# Altium PCB PCB2.PcbDoc
Units mil, origin at the board's own origin, x right, y up, seen from the top; angles counter-clockwise.
Board outline 2850 x 2950 mil, 2 copper layers (Top Layer, Bottom Layer); 19 components, 11 nets, 66 pads, 0 vias.
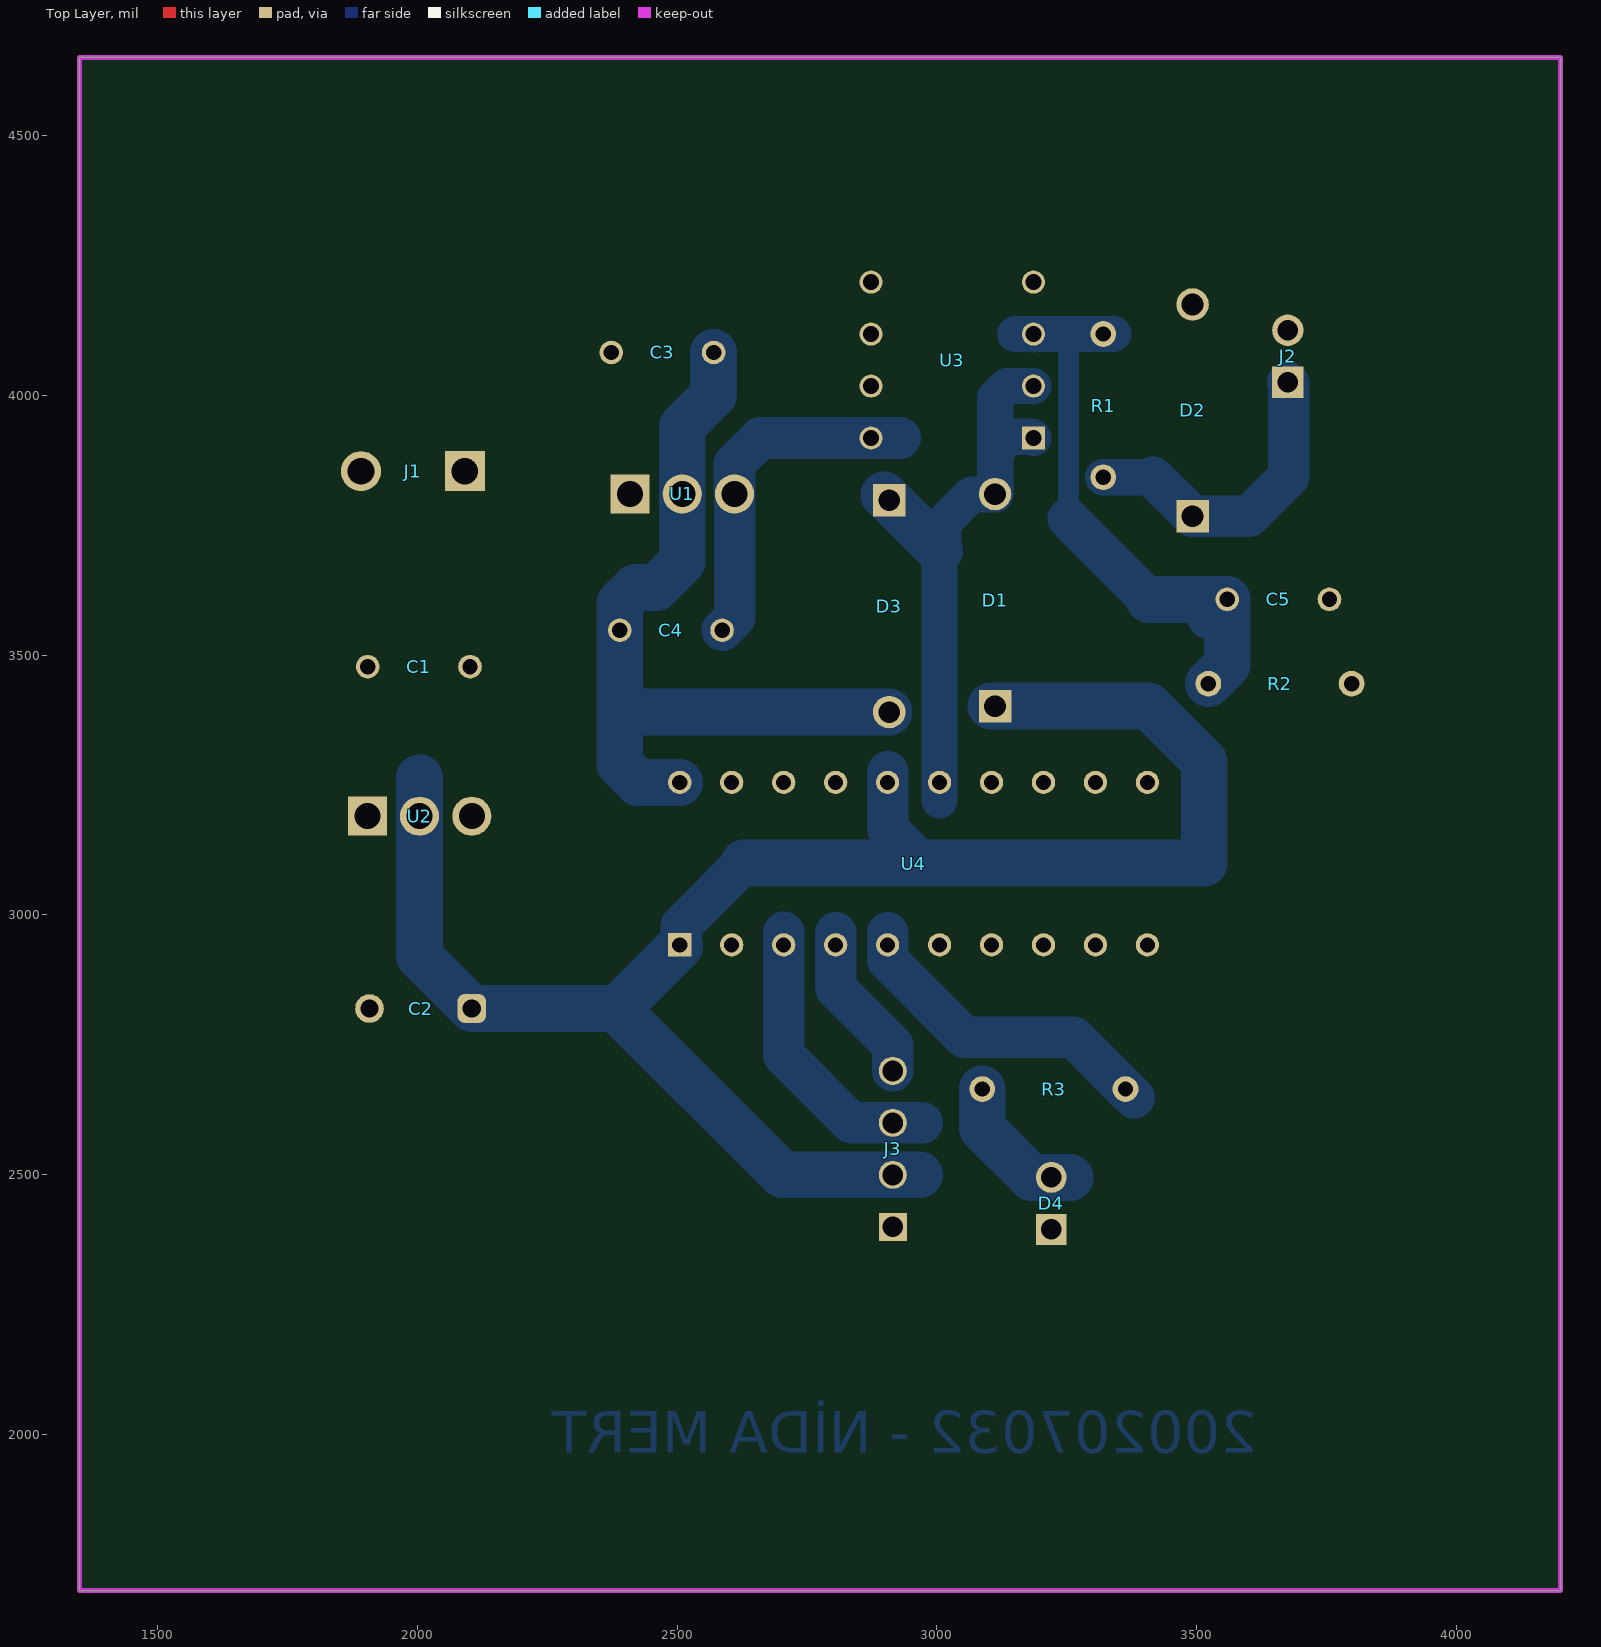
[diagram p0: Top Layer view]
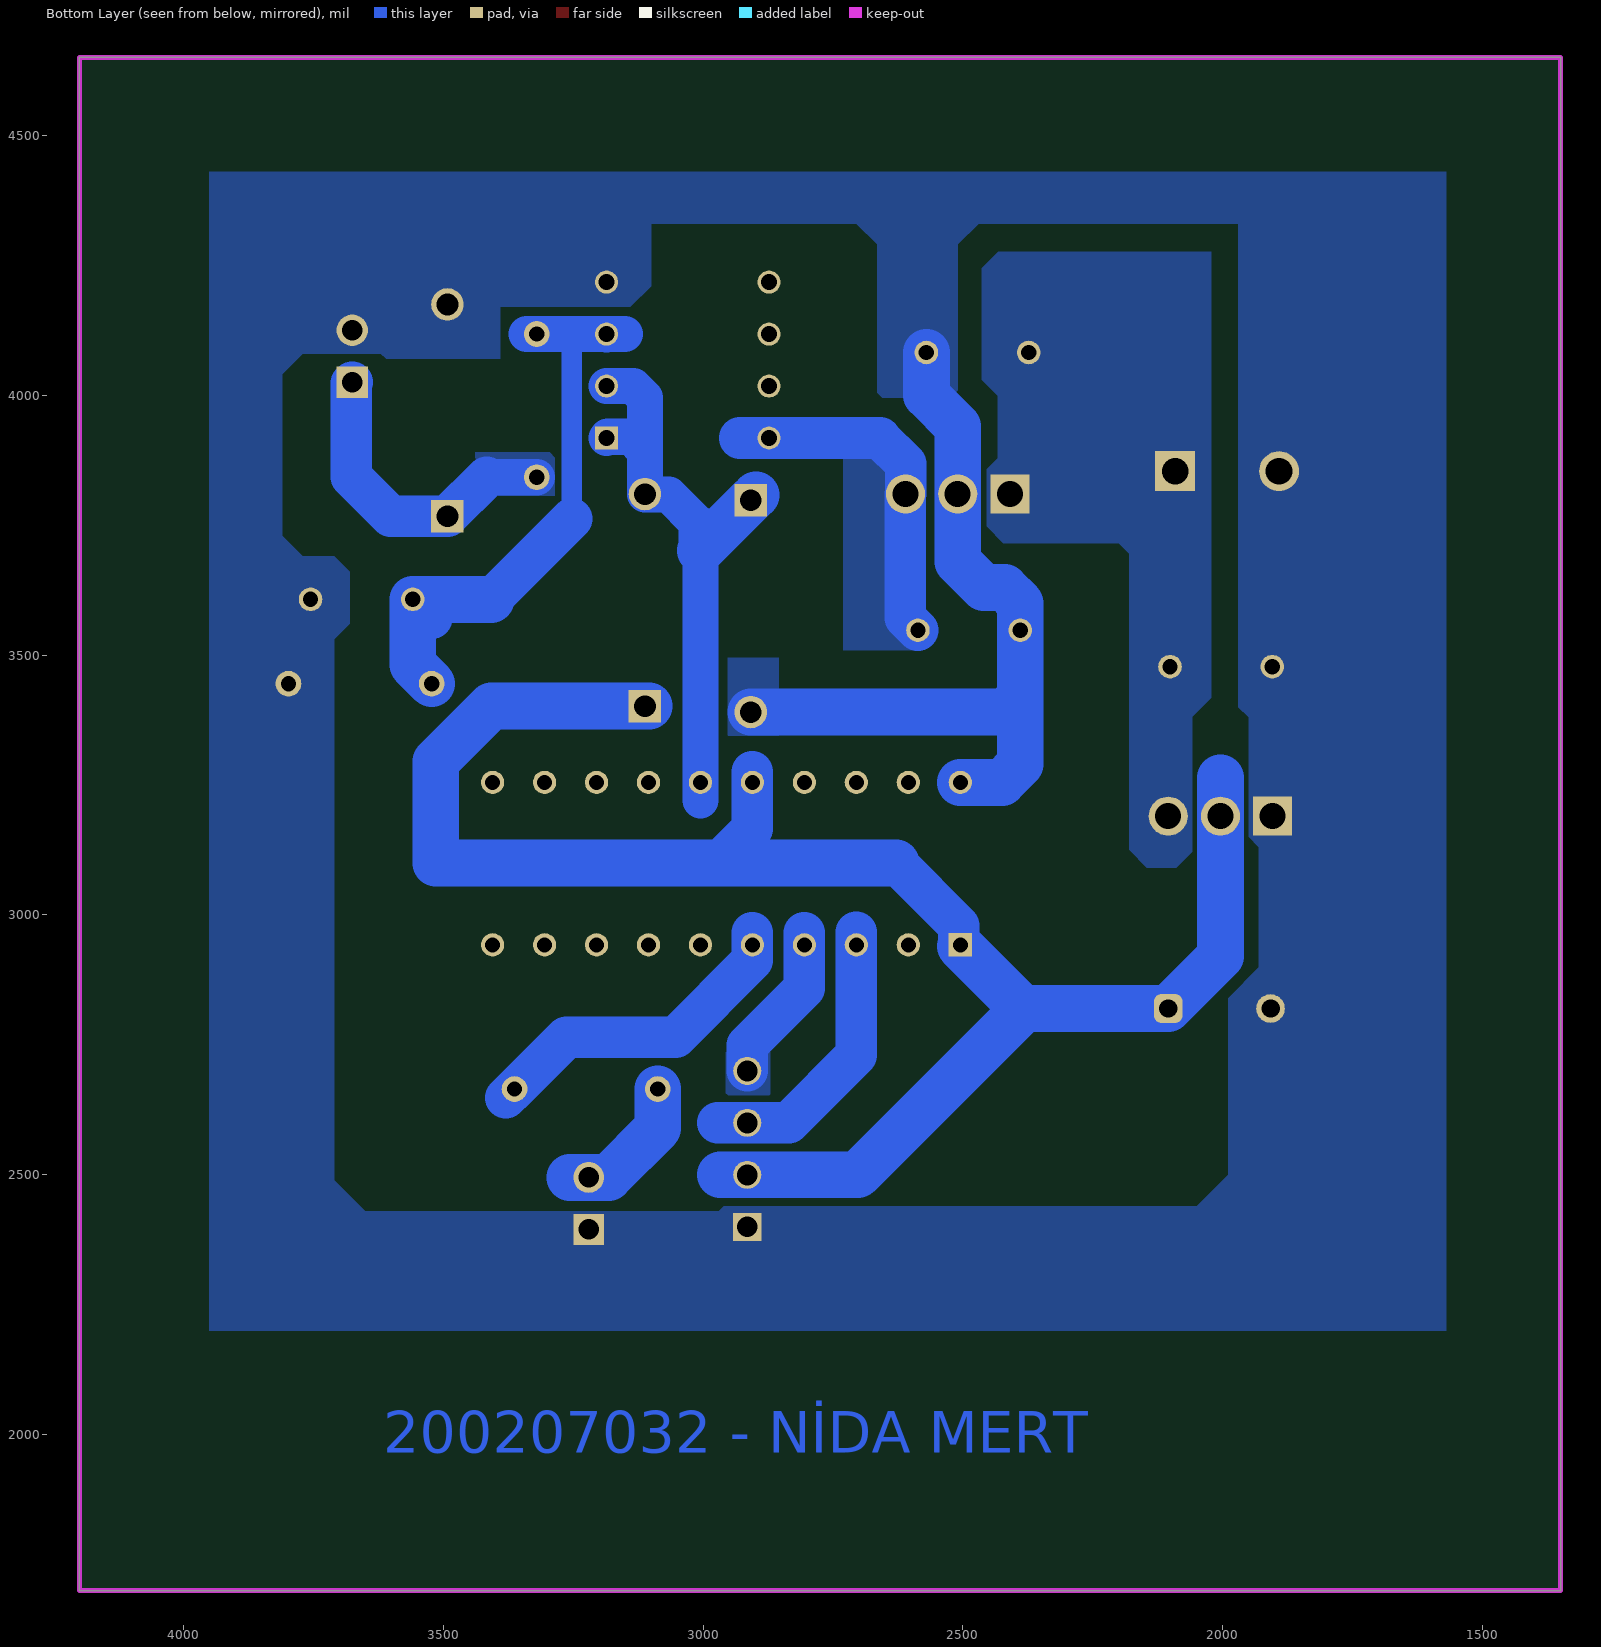
[diagram p1: Bottom Layer view, seen from below]
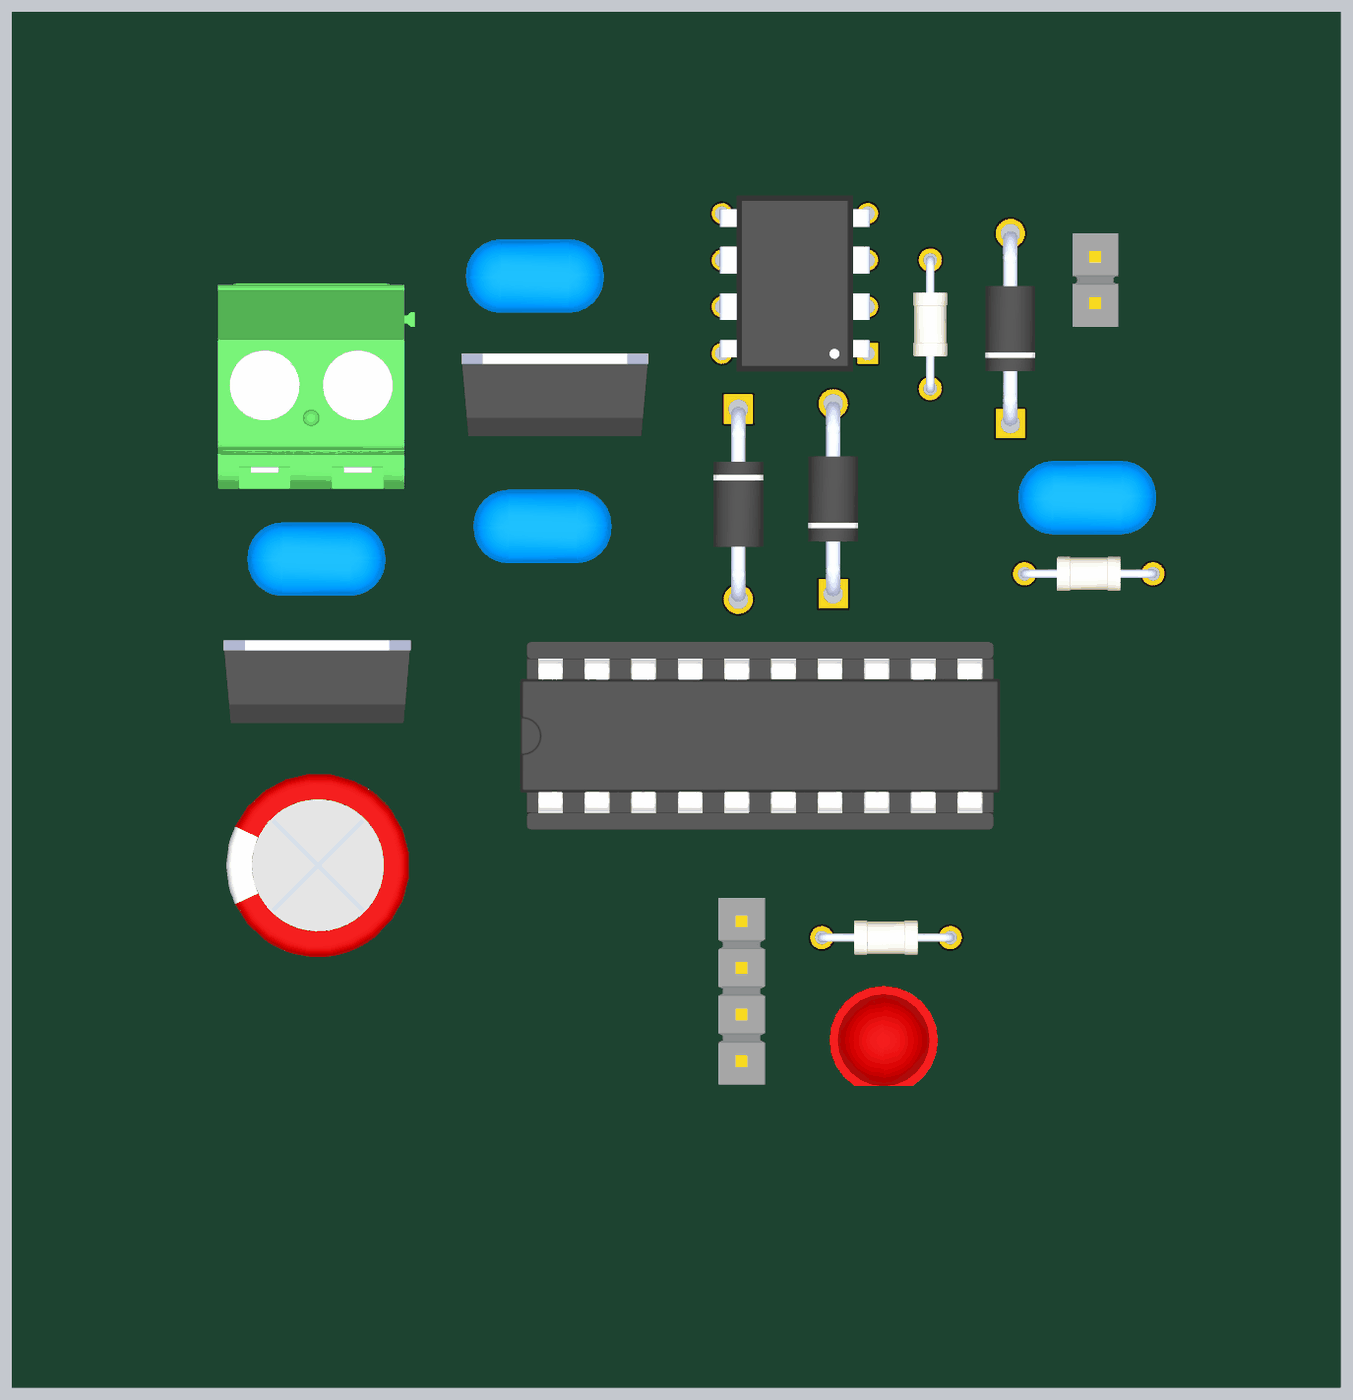
[diagram p2: 3D render of the assembled board from above, using the file's embedded part models]

## Layer stack, top to bottom
Top Solder: solder mask 0.4, Solder Resist, Dk 3.5
Top Layer: signal copper 1.4
Dielectric 1: dielectric 12.6, FR-4, Dk 4.8
Bottom Layer: signal copper 1.4
Bottom Solder: solder mask 0.4, Solder Resist, Dk 3.5

## Board outline
1350,1700 1350,4650 4200,4650 4200,1700

## Design rules (kind name [scope] priority, off if disabled: settings)
Clearance [All] p1: gap=10 ignorepadtopadclearanceinfootprint=FALSE
PolygonConnect [All] p1: connectstyle=Direct reliefconductorwidth=10 reliefentries=4 polygonreliefangle="90 Angle" airgapwidth=10
RoutingVias [All] p1: holewidth=28 width=50 viastyle="Through Hole" minholewidth=28 minwidth=50 maxholewidth=28 maxwidth=50
SolderMaskExpansion [All] p1: expansion=4 istentingtop=FALSE
SupplyNets "Schematic Supply Nets_3" [InNet('+3V3')] p1: voltage=0.000
SupplyNets "Schematic Supply Nets_2" [InNet('VCC')] p2: voltage=0.000
SupplyNets "Schematic Supply Nets_1" [InNet('GND')] p3: voltage=0.000
SupplyNets "Schematic Supply Nets" [InNet('+5V')] p4: voltage=0.000
Width [All] p1: maxlimit=10 minlimit=10 preferedwidth=10
30 further rules are at their usual default settings.

## Classes and differential pairs
component class Sheet1: C1 C2 C3 C4 C5 D1 D2 D3 D4 J1 J2 R1 R2 R3 U1 U2 U3 U4

## Components (designator, comment, footprint, x,y, rotation, side; value= is the part's Value field where it differs from the comment)
C1 "100nF" 5MM-CAPACITOR-UNIPOLAR 2005,3480 r0 top
C2 "10uF" 5mm_Capacitor 2003.43,2824.84 r0 top
C3 "330nF" 5MM-CAPACITOR-UNIPOLAR 2470,4080 r180 top
C4 "100nF" 5MM-CAPACITOR-UNIPOLAR 2490,3550 r0 top
C5 "1nF" 5MM-CAPACITOR-UNIPOLAR 3655,3605 r180 top
D1 "ZENER-3V3" ZENER 3110,3600 r90 top
D2 "ZENER-12V" ZENER 3490,3965 r90 top
D3 "ZENER-3V3" ZENER 2910,3600 r270 top
D4 "RED LED" LED 3220,2445 r90 top
J1 "2_PIN_TERMINAL_BLOCK" 2_PIN_TERMINAL_BLOCK 1990,3850 r180 top
J2 "2PIN-HEADER" 2PIN-HEADER-2.54mm 3670,4070 r270 top
J3 "4PIN-HEADER" 4PIN-HEADER-2.54mm 2914.88,2550.21 r270 top
R1 "22K" 7MM_RESISTOR 3320,3975 r270 top
R2 "8.2K" 7MM_RESISTOR 3655,3445 r180 top
R3 "100 ohm" 7MM_RESISTOR 3230,2665 r0 top
U1 "L7805CV" L7805CV_TO220 2510.79,3807.83 r0 top
U2 "LD1117V33" LD1117_TO-220AB 2004.61,3188.82 r0 top
U3 "LM358P" LM358P 3020,4075 r180 top
U4 "MSP430G2553IN20" DIP20-TH 2960,3093.7 r90 top

## Footprints (in the part's own frame and the unit in brackets; to place one, negate y for a bottom-side part, rotate by r counter-clockwise, add the part's x,y. Pads: shape width x height; smd on the part's side, far side on the other; paste and mask are expansions set on the pad)
2_PIN_TERMINAL_BLOCK [mm]
  rect 1.95x1.95 / inner round 1.95 / far side rect 1.95x1.95 hole 1.3: 1(-2.586,-0.1)
  round 1.95 hole 1.3: 2(2.494,-0.1)
  body extent -5.7,-5.53 5.03,5.65, height 18.3
2PIN-HEADER-2.54mm [mm]
  rect 1.53x1.53 / inner round 1.53 / far side rect 1.53x1.53 hole 1.02: 1(1.143,0.127)
  round 1.53 hole 1.02: 2(-1.397,0.127)
  body extent -2.67,-1.14 2.41,1.35, height 9.96
4PIN-HEADER-2.54mm [mm]
  rect 1.37x1.37 / inner round 1.37 / far side rect 1.37x1.37 hole 1.02: 01(3.815,0.003)
  round 1.37 hole 1.02: 02(1.275,0.003) 03(-1.265,0.003) 04(-3.805,0.003)
  body extent -5.07,-1.27 5.09,1.27, height 14.63
5MM-CAPACITOR-UNIPOLAR [mm]
  round 1.15 hole 0.75: 1(-2.547,-0.056) 2(2.453,-0.056)
  body extent -3.8,-2.09 3.7,1.91, height 10.01
5mm_Capacitor [mm]
  rrect50% 1.4x1.4 hole 0.9: 1(2.58,-0.123)
  round 1.4 hole 0.9: 2(-2.42,-0.123)
  body extent -4.91,-5.12 5.08,4.88, height 12.81
7MM_RESISTOR [mm]
  round 1.258 hole 0.75: 1(-3.627,0) 2(3.373,0)
  body extent -3.85,-0.92 3.6,0.92, height 1.84
DIP20-TH [mm]
  rect 1.14x1.14 / inner round 1.14 / far side rect 1.14x1.14 hole 0.74: 1(-3.843,11.557)
  round 1.14 hole 0.74: 2(-3.843,9.017) 3(-3.843,6.477) 4(-3.843,3.937) 5(-3.843,1.397) 6(-3.843,-1.143) 7(-3.843,-3.683) 8(-3.843,-6.223) 9(-3.843,-8.763) 10(-3.843,-11.303) 11(4.097,-11.303) 12(4.097,-8.763) 13(4.097,-6.223) 14(4.097,-3.683) 15(4.097,-1.143) 16(4.097,1.397) 17(4.097,3.937) 18(4.097,6.477) 19(4.097,9.017) 20(4.097,11.557)
  body extent -4.99,-12.95 5.21,13.2, height 7.88
L7805CV_TO220 [mm]
  rect 1.91x1.91 / inner round 1.91 / far side rect 1.91x1.91 hole 1.27: 1(-2.57,0.055)
  round 1.91 hole 1.27: 2(-0.02,0.055) 3(2.53,0.055)
  body extent -5,-1.72 5.2,2.78, height 19.68
LD1117_TO-220AB [mm]
  rect 1.91x1.91 / inner round 1.91 / far side rect 1.91x1.91 hole 1.27: 1(-2.55,0.03)
  round 1.91 hole 1.27: 2(0,0.03) 3(2.55,0.03)
  body extent -5.1,-1.62 5.1,2.89, height 19.68
LED [mm]
  round 1.508 hole 1: A(1.27,0)
  rect 1.508x1.508 / inner round 1.508 / far side rect 1.508x1.508 hole 1: C(-1.27,0)
  body extent -2.5,-2.95 2.95,2.95, height 9.6
LM358P [mm]
  rect 1.13x1.13 / inner round 1.13 / far side rect 1.13x1.13 hole 0.78: 1(-4.209,3.997)
  round 1.13 hole 0.78: 2(-4.209,1.457) 3(-4.209,-1.083) 4(-4.209,-3.623) 5(3.731,-3.623) 6(3.731,-1.083) 7(3.731,1.457) 8(3.731,3.997)
  body extent -4.33,-4.61 3.86,4.98, height 5.08
ZENER [mm]
  rect 1.59x1.59 / inner round 1.59 / far side rect 1.59x1.59 hole 1.06: 1(-5.033,-0.046)
  round 1.59 hole 1.06: 2(5.327,-0.046)
  body extent -5.14,-1.41 5.43,1.31, height 2.72

## Part data
C1 C3 C4 C5: library part Capacitor-Unipolar
C2: library part Capacitor
D1 D2 D3: library part ZENER
D4: library part LED
R1 R2 R3: library part Resistor

## Nets (pads, with @x,y where several pads share a name; then routed paths per layer and width w, separated by ;. In a path a pad name is that pad's centre, name@x,y a point inside that pad or via, vN(x,y) a via of type N, cw(c..) or ccw(c..) an arc to the next point about the centre after c; other vN are vias at no path point)
+3V3: C2.1 D1.1 J3.02 U2.2 U4.1 U4.16 | length 3632.3
  Bottom Layer w10: U4.1 2507.67,2942.4 2532.56,2942.4 ; 3514.14,3100 3520,3105.86
  Bottom Layer w80: U4.1@2507.67,2942.4 2507.67,2979 2628.67,3100 ; U4.16@2905,3275 U4.16 2905,3166 2971,3100
  Bottom Layer w90: 2004.61,3264 U2.2 2004.61,2920.39 C2.1 2382.6,2820 2383.93,2818.67 ; U4.1@2505,2939.73 2383.93,2818.67 ; 2628.67,3100 2971,3100 3514.14,3100 3514.14,3295.27 3407.57,3401.85 D1.1 D1.1@3104,3401.85 ; 2967,2500 J3.02 2702.6,2500 2383.93,2818.67
+5V: C4.2 U1.3 U3.8 | length 669.8
  Bottom Layer w80: C4.2 2610.78,3572.01 2610.78,3809.61 U1.3 2610.39,3868.39 2659.64,3917.64 U3.8 2929,3917.64
GND: C1.1 C2.2 C3.1 C4.1 C5.1 D2.2 D3.2 D4.C J1.2 J2.2 J3.01 R2.1 U1.2 U2.1 U3.4 U4.20 | length 1550.4
  Bottom Layer w90: U4.20 2425,3255 2389.72,3290.28 2389.72,3419.04 ; C3.1 2570.28,4000.28 2510,3940 U1.2 2510,3680 2460,3630 2420,3630 2389.72,3599.72 C4.1 2389.72,3419.04 ; D3.2 2418.48,3390.28 2389.72,3419.04
NetC5_2: C5.2 R1.1 R2.2 U3.3 | length 1142
  Bottom Layer w40: 3252.85,3762.15 3252.85,4117.72
  Bottom Layer w70: 3151,4117.72 U3.3@3185.79,4117.72 ; U3.3 U3.3@3185.79,4117.72 ; R1.1 R1.1@3319.92,4117.72 ; R1.1@3339,4117.72 R1.1@3319.92,4117.72 ; U3.3@3185.79,4117.72 3252.85,4117.72 R1.1@3319.92,4117.72
  Bottom Layer w80: 3252.85,3762.15 3407.8,3607.2 ; 3522.2,3570.98 C5.2
  Bottom Layer w90: 3407.8,3607.2 C5.2 3558.43,3481.22 R2.2
NetD1_2: D1.2 D3.1 U3.1 U3.2 U4.15 | length 1162
  Bottom Layer w70: 3005,3221 U4.15 3005,3701.34 ; 3012.34,3701.34 3012.34,3755.34 3066,3809 3111.09,3809 D1.2 3111.81,3892.81 ; U3.1 3183.35,3920 3139,3920 3111.81,3892.81 ; U3.2 3134.64,4017.64 3111.81,3994.81 3111.81,3892.81
  Bottom Layer w90: D3.1@2898.17,3808.17 D3.1 3005,3701.34
NetD2_1: D2.1 J2.1 R1.2 | length 602.6
  Bottom Layer w70: R1.2 3416.46,3842.2
  Bottom Layer w80: 3416.46,3842.2 D2.1 3600.85,3766.85 3677,3843 3677,4023 J2.1
NetD4_A: D4.A R3.1 | length 283.3
  Bottom Layer w90: R3.1 3087.2,2589.8 3182,2495 D4.A 3256,2495
NetJ3_03: J3.03 U4.3 | length 557.5
  Bottom Layer w80: 2705,2967 U4.3 2705,2730.51 2835.51,2600 J3.03 2972,2600
NetJ3_04: J3.04 U4.4 | length 311.6
  Bottom Layer w80: 2804.94,2966 2804.94,2859.06 2915,2749 J3.04
NetR3_2: R3.2 U4.5 | length 637.7
  Bottom Layer w80: 2905,2966 U4.5 2905,2913 3053,2765 3262.8,2765 R3.2 R3.2@3379.9,2647.9
VCC: C1.2 C3.2 J1.1 U1.1 U2.3
pads on no net: U3.5 U3.6 U3.7 U4.2 U4.6 U4.7 U4.8 U4.9 U4.10 U4.11 U4.12 U4.13 U4.14 U4.17 U4.18 U4.19

## Polygon pours and split planes (outlines as drawn)
NetD2_1 on Bottom Layer "NETD2_1_L02_P007" (solid, pour order 7): 3285,3807 3394,3807 3394,3877 3395,3876 3436,3876 3437,3875 3438,3876 3438,3890 3295,3890 3285,3880 3285,3808
GND on Bottom Layer "GND_L02_P006" (solid, pour order 6): 2854,3495 2953,3495 2953,3346 2952,3345 2854,3345
+5V on Bottom Layer "+5V_L02_P005" (solid, pour order 5): 2580,3509 2730,3509 2730,3882 2580,3882
NetJ3_04 on Bottom Layer "NETJ3_04_L02_P004" (solid, pour order 4): 2871,2736 2871,2655 2873,2653 2952,2653 2956,2657 2956,2736
VCC on Bottom Layer "VCC_L02_P003" (solid, pour order 3): 2022,4276 2432,4276 2464.03,4243.97 2464.03,4030.03 2433,3999 2433,3879 2455,3857 2455,3748 2422,3715 2200,3715 2180,3695 2180,3125 2146,3091 2090,3091 2059,3122 2059,3381 2022,3418
GND on Bottom Layer "GND_L02_P001" (solid, pour order 1): 1925,4430 3170,4430 3170,4330 2705,4330 2665,4290 2665,4005 2655,3995 2525,3995 2510,4010 2510,4290 2470,4330 1925,4330
GND on Bottom Layer "GND_L02_P000" (solid, pour order 0): 1570,4430 1570,2200 3950,2200 3950,4430 3150,4430 3100,4380 3100,4210 3140,4170 3390,4170 3390,4070 3610,4070 3620,4080 3770,4080 3810,4040 3810,3730 3770,3690 3710,3690 3680,3660 3680,3560 3710,3530 3710,2490 3650,2430 2970,2430 2960,2440 2050,2440 1990,2500 1990,2840 1930,2900 1930.71,2900.71 1930.71,3130.71 1950,3150 1950,3380 1970,3400 1970,4430

## Keep-outs
Keep-Out Layer:
  the board outline again, w10

## Other copper
Bottom Layer:
  text "200207032 - NİDA MERT" at 3615,1965 h80